# Altium PCB Led Panel.PcbDoc
Units mm, origin at the board's own origin, x right, y up, seen from the top; angles counter-clockwise.
Board outline 58 x 58 mm, 2 copper layers (Top Layer, Bottom Layer), stack 1.57 mm thick; 50 components, 2 nets, 107 pads, 99 vias.
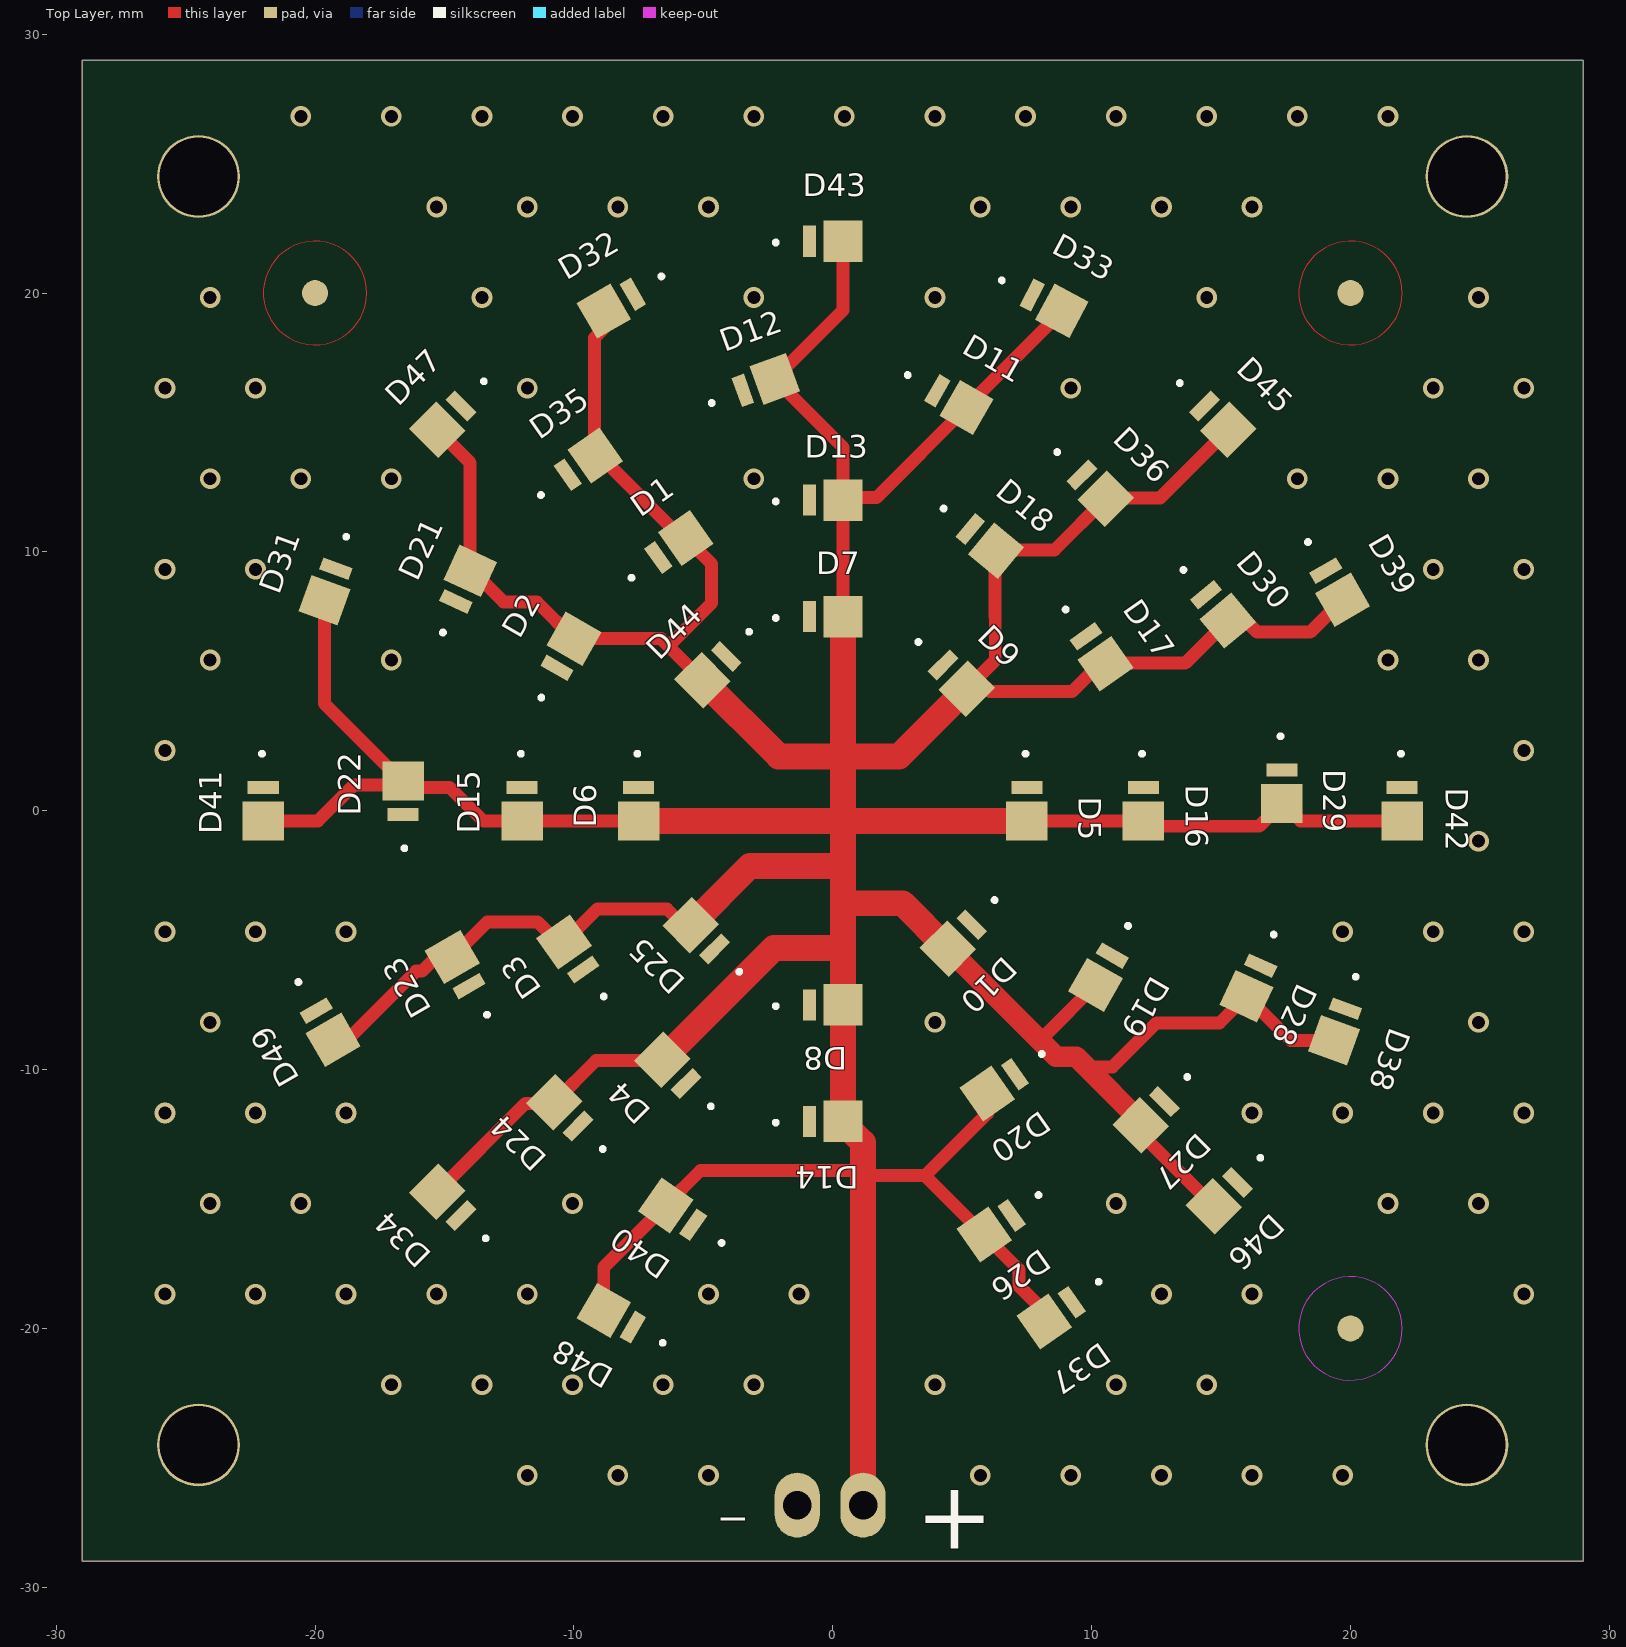
[diagram p0: Top Layer view]
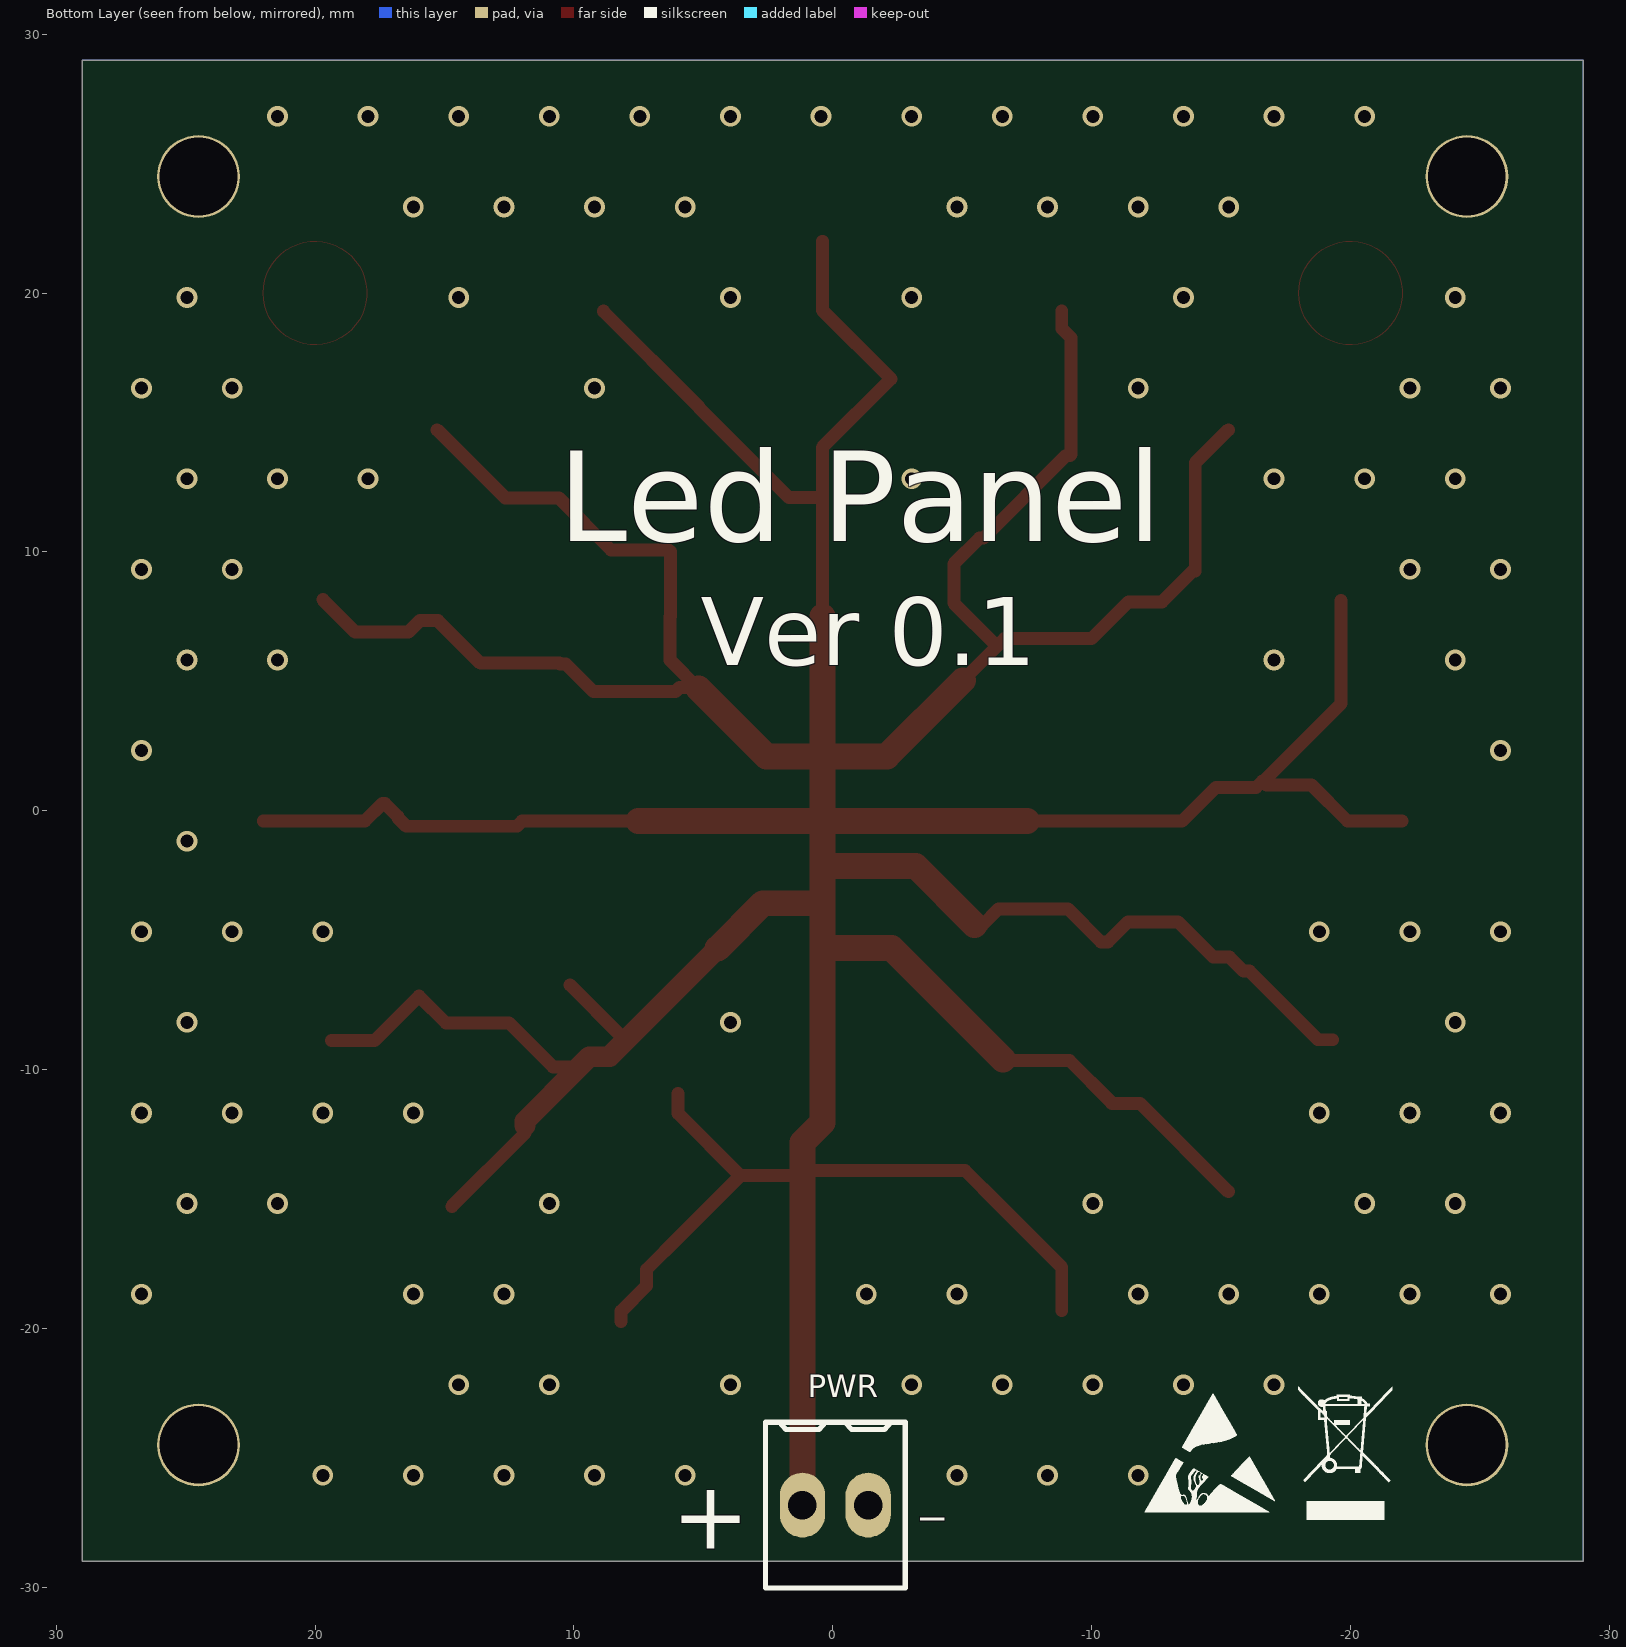
[diagram p1: Bottom Layer view, seen from below]
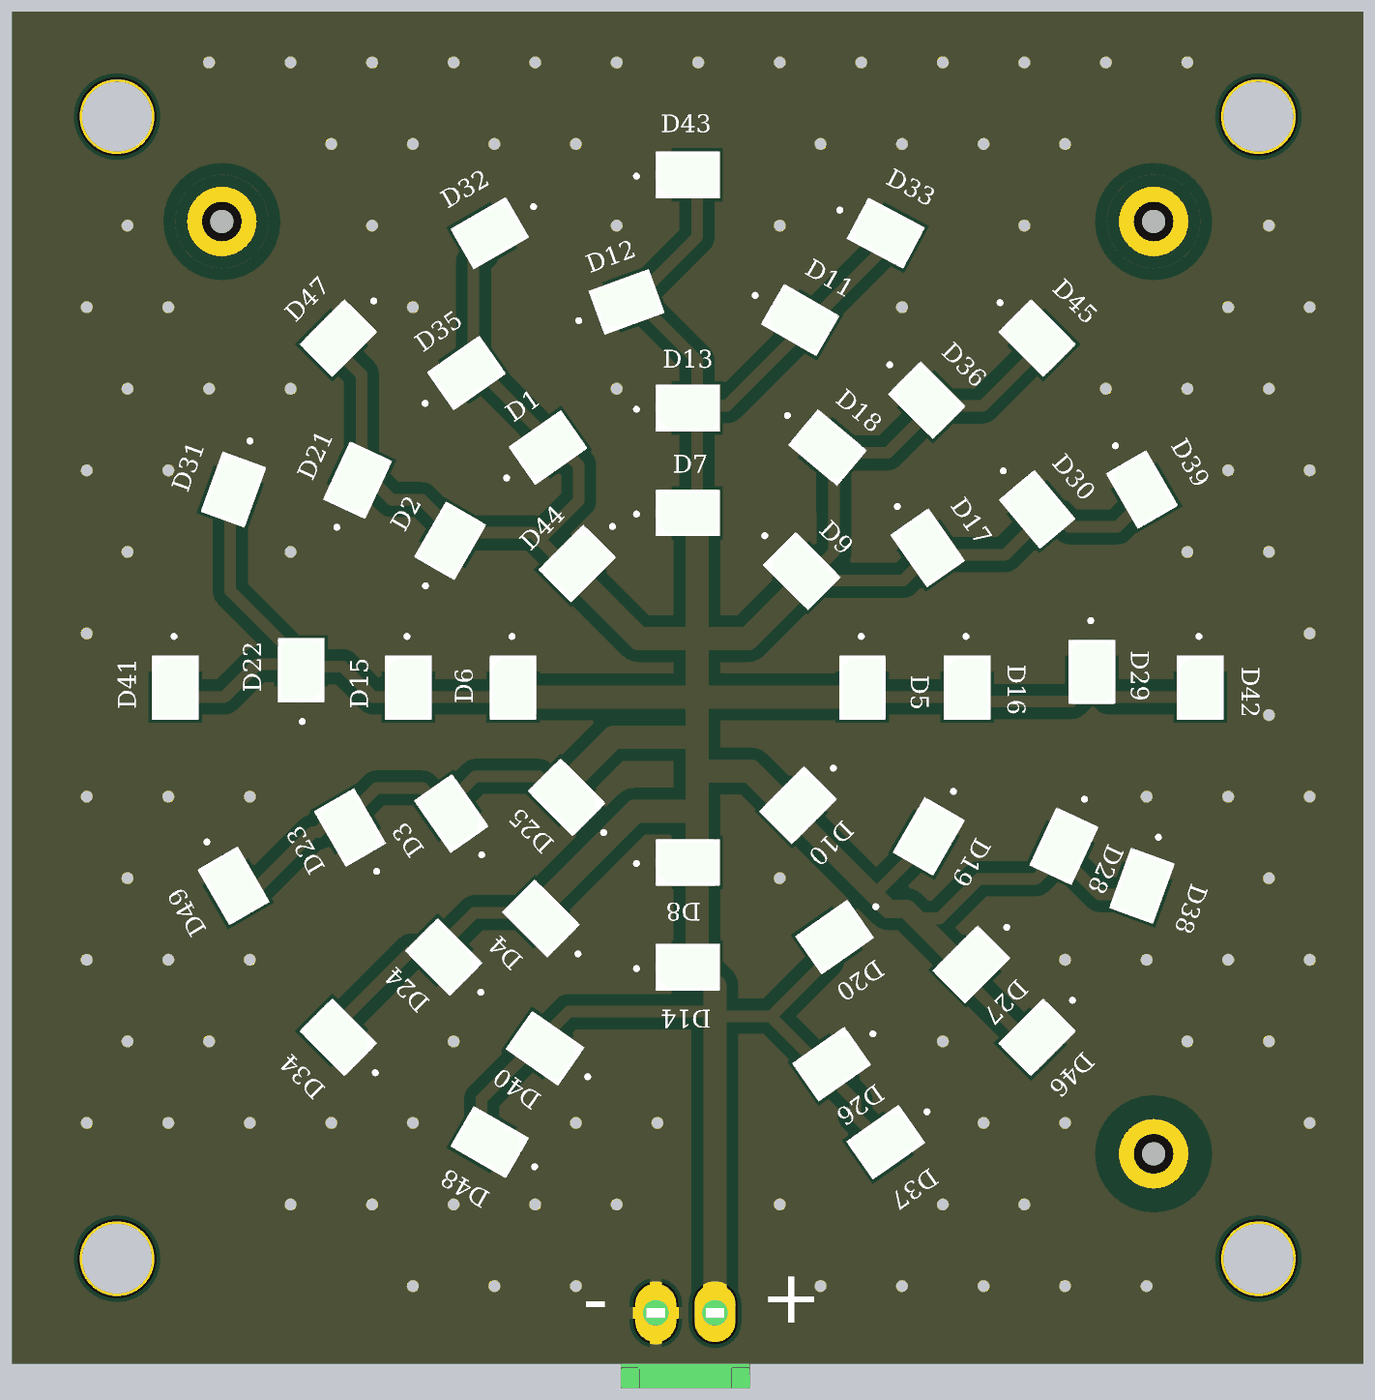
[diagram p2: 3D render of the assembled board from above, using the file's embedded part models]

## Layer stack, top to bottom
Top Solder: solder mask 0.0102, Solder Resist, Dk 3.5
Top Layer: signal copper 0.0356
Dielectric 1: core 1.4986, Core-043, Dk 4.3
Bottom Layer: signal copper 0.0356
Bottom Solder: solder mask 0.0102, Solder Resist, Dk 3.5

## Board outline
-29,-29 -29,29 29,29 29,-29

## Design rules (kind name [scope] priority, off if disabled: settings)
Clearance [All] p1: gap=0.254 ignorepadtopadclearanceinfootprint=FALSE except(0: Arc-Hole Track-Hole SMDPad-Hole THPad-Hole Via-Hole Fill-Hole Poly-Hole Region-Hole Text-Hole; 0.35: SMDPad-Fill SMDPad-Poly SMDPad-Region; 0.5: Arc-Fill Arc-Poly Arc-Region Track-Fill Track-Poly Track-Region)
PlaneClearance [All] p1: clearance=0.5
PlaneConnect [All] p1: planeconnectstyle=Relief reliefexpansion=0.508 reliefentries=4 reliefconductorwidth=0.5 reliefairgap=0.254
PolygonConnect [All] p1: thpad.connectstyle=Relief thpad.reliefconductorwidth=0.5 thpad.reliefentries=4 thpad.polygonreliefangle="90 Angle" thpad.airgapwidth=0.254 smdpad.connectstyle=Relief smdpad.reliefconductorwidth=0.35 smdpad.reliefentries=4 smdpad.polygonreliefangle="90 Angle" smdpad.airgapwidth=0.254 via.connectstyle=Direct via.reliefconductorwidth=0.254 via.reliefentries=4 via.polygonreliefangle="90 Angle" via.airgapwidth=0.254
RoutingVias [All] p1: holewidth=0.711 width=1.27 viastyle="Through Hole" minholewidth=0.711 minwidth=1.27 maxholewidth=0.711 maxwidth=1.27
SolderMaskExpansion [All] p1: expansion=0.102 istentingtop=FALSE
Width [All] p1: maxlimit=1 minlimit=0.35 preferedwidth=0.5
28 further rules are at their usual default settings.

## Components (designator, comment, footprint, x,y, rotation, side; value= is the part's Value field where it differs from the comment)
D1 "L1IG-0750100000000" L1IG0750100000000 -6,10.3 r35 top
D2 "L1IG-0750100000000" L1IG0750100000000 -10.2,6.3 r60 top
D3 "L1IG-0750100000000" L1IG0750100000000 -10.15,-5.4 r125 top
D4 "L1IG-0750100000000" L1IG0750100000000 -6.3,-9.9 r135 top
D5 "L1IG-0750100000000" L1IG0750100000000 7.5,0 r270 top
D6 "L1IG-0750100000000" L1IG0750100000000 -7.5,0 r270 top
D7 "L1IG-0750100000000" L1IG0750100000000 0,7.5 r0 top
D8 "L1IG-0750100000000" L1IG0750100000000 0,-7.5 r0 top
D9 "L1IG-0750100000000" L1IG0750100000000 4.9,5 r315 top
D10 "L1IG-0750100000000" L1IG0750100000000 4.733,-5.042 r225 top
D11 "L1IG-0750100000000" L1IG0750100000000 4.825,15.775 r330 top
D12 "L1IG-0750100000000" L1IG0750100000000 -2.625,16.55 r20 top
D13 "L1IG-0750100000000" L1IG0750100000000 0,12 r0 top
D14 "L1IG-0750100000000" L1IG0750100000000 0,-12 r0 top
D15 "L1IG-0750100000000" L1IG0750100000000 -12,0 r270 top
D16 "L1IG-0750100000000" L1IG0750100000000 12,0 r270 top
D17 "L1IG-0750100000000" L1IG0750100000000 10.3,6 r305 top
D18 "L1IG-0750100000000" L1IG0750100000000 6,10.3 r320 top
D19 "L1IG-0750100000000" L1IG0750100000000 10.35,-6.379 r240 top
D20 "L1IG-0750100000000" L1IG0750100000000 6.3,-10.7 r215 top
D21 "L1IG-0750100000000" L1IG0750100000000 -14.175,8.9 r65 top
D22 "L1IG-0750100000000" L1IG0750100000000 -16.6,0.75 r90 top
D23 "L1IG-0750100000000" L1IG0750100000000 -14.5,-6 r120 top
D24 "L1IG-0750100000000" L1IG0750100000000 -10.475,-11.55 r135 top
D25 "L1IG-0750100000000" L1IG0750100000000 -5.2,-4.7 r135 top
D26 "L1IG-0750100000000" L1IG0750100000000 6.175,-16.15 r215 top
D27 "L1IG-0750100000000" L1IG0750100000000 12.175,-11.875 r225 top
D28 "L1IG-0750100000000" L1IG0750100000000 16.15,-6.8 r245 top
D29 "L1IG-0750100000000" L1IG0750100000000 17.35,0.675 r270 top
D30 "L1IG-0750100000000" L1IG0750100000000 15,7.65 r310 top
D31 "L1IG-0750100000000" L1IG0750100000000 -19.5,8.5 r250 top
D32 "L1IG-0750100000000" L1IG0750100000000 -8.5,19.5 r210 top
D33 "L1IG-0750100000000" L1IG0750100000000 8.5,19.5 r332 top
D34 "L1IG-0750100000000" L1IG0750100000000 -15,-15 r135 top
D35 "L1IG-0750100000000" L1IG0750100000000 -9.5,13.5 r35 top
D36 "L1IG-0750100000000" L1IG0750100000000 10.262,12.334 r315 top
D37 "L1IG-0750100000000" L1IG0750100000000 8.5,-19.5 r215 top
D38 "L1IG-0750100000000" L1IG0750100000000 19.5,-8.5 r250 top
D39 "L1IG-0750100000000" L1IG0750100000000 19.5,8.5 r300 top
D40 "L1IG-0750100000000" L1IG0750100000000 -6.125,-15.475 r145 top
D41 "L1IG-0750100000000" L1IG0750100000000 -22,0 r270 top
D42 "L1IG-0750100000000" L1IG0750100000000 22,0 r270 top
D43 "L1IG-0750100000000" L1IG0750100000000 0,22 r0 top
D44 "L1IG-0750100000000" L1IG0750100000000 -4.75,5.325 r225 top
D45 "L1IG-0750100000000" L1IG0750100000000 15,15 r315 top
D46 "L1IG-0750100000000" L1IG0750100000000 15,-15 r225 top
D47 "L1IG-0750100000000" L1IG0750100000000 -15,15 r225 top
D48 "L1IG-0750100000000" L1IG0750100000000 -8.5,-19.5 r150 top
D49 "L1IG-0750100000000" L1IG0750100000000 -19.5,-8.5 r300 top
PWR "282834-2" "TE 282834-2" -0.1,-26.825 r180 bottom (schematic designator J1)

## Footprints (in the part's own frame and the unit in brackets; to place one, negate y for a bottom-side part, rotate by r counter-clockwise, add the part's x,y. Pads: shape width x height; smd on the part's side, far side on the other; paste and mask are expansions set on the pad)
L1IG0750100000000 [mm]
  rect 0.5x1.2 smd: 1(-0.9,0)
  rect 1.5x1.6 smd: 2(0.4,0)
  silkscreen extent -2.25,-0.1 -2.15,0, body extent -1.38,-1 1.37,1, height 0.6
"TE 282834-2" [mm]
  oval 1.75x2.5 hole 1.1: 1(-1.27,0) 2(1.27,0)
  silkscreen extent -2.7,-3.2 2.7,3.2, body extent -2.77,-3.25 2.77,3.25, height 10

## Part data
D1 D2 D3 D4 D5 D6 D7 D8 D9 D10 D11 D12 D13 D14 D15 D16 D17 D18 D19 D20 D21 D22 D23 D24 D25 D26 D27 D28 D29 D30 D31 D32 D33 D34 D35 D36 D37 D38 D39 D40 D41 D42 D43 D44 D45 D46 D47 D48 D49: "Infrared Emitters - High Power Broadrange IR LED 600 - 1050nm", Manufacturer_Name=Lumileds, Mouser Part Number=997-L1IG075010000, Datasheet Link=https://www.lumileds.com/uploads/838/DS263-luxeon-ir-onyx-datasheet-pdf, Manufacturer_Part_Number=L1IG-0750100000000, Mouser Price/Stock=https://www.mouser.co.uk/ProductDetail/Lumileds/L1IG-0750100000000?qs=UXgszm6BlbFsaqyaTO4YIQ%3D%3D
PWR: "TERM BLK 2P SIDE ENT 2.54MM PCB", Color=Green, Current=10A, Manufacturer="TE Connectivity AMP Connectors", Supplier Part Number 1=A98333-ND, Voltage=150V, ComponentLink1Description=Datasheet, ComponentLink1URL=https://www.te.com/commerce/DocumentDelivery/DDEController?Action=srchrtrv&DocNm=282834&DocType=Customer+Drawing&DocLang=English, ComponentLink2Description="DigiKey Link", ComponentLink2URL=http://digikey.com/product-detail/en/te-connectivity-amp-connectors/282834-2/A98333-ND/1150135, LastUpdated="1/15/2020 4:15:38 AM", Lifecycle Status=Active, Mating Orientation="Horizontal with Board", Minimum Order=1, Mounting Type="Through Hole", Number of Levels=1, Packaging=Bulk, Part Number=282834-2, Part Status=Active, Pitch="0.100\" (2.54mm)", Positions Per Level=2, Price=0.88, Series=Buchanan, Supplier 1=DigiKey, Wire Gauge="16-30 AWG", Wire Termination="Screw - Rising Cage Clamp"

## Free pads (board coordinates)
  round 1 smd paste+0 mask+1: F1(20,-20) F2(20,20) F3(-20,20)
  round 3.2 hole 3 mask+0.102: MH(-24.5,-24.5) MH(-24.5,24.5) MH(24.5,-24.5) MH(24.5,24.5)

## Via types
v1: diameter 0.8, hole 0.5, Top Layer to Bottom Layer, tented both sides, 99 vias

## Nets (pads, with @x,y where several pads share a name; then routed paths per layer and width w, separated by ;. In a path a pad name is that pad's centre, name@x,y a point inside that pad or via, vN(x,y) a via of type N, cw(c..) or ccw(c..) an arc to the next point about the centre after c; other vN are vias at no path point)
3V3: D1.2 D2.2 D3.2 D4.2 D5.2 D6.2 D7.2 D8.2 D9.2 D10.2 D11.2 D12.2 D13.2 D14.2 D15.2 D16.2 D17.2 D18.2 D19.2 D20.2 D21.2 D22.2 D23.2 D24.2 D25.2 D26.2 D27.2 D28.2 D29.2 D30.2 D31.2 D32.2 D33.2 D34.2 D35.2 D36.2 D37.2 D38.2 D39.2 D40.2 D41.2 D42.2 D43.2 D44.2 D45.2 D46.2 D47.2 D48.2 D49.2 PWR.1 | length 300
  Top Layer w0.5: D41.2 -19.889,-0.4 -18.49,1 -16.75,1 D22.2 ; D31.2 -19.637,4.137 -16.65,1.15 D22.2 ; D49.2 -18.746,-8.846 -16.1,-6.2 -15.868,-6.2 -15.322,-5.654 D23.2 -13.346,-4.3 -11.4,-4.3 -10.628,-5.072 D3.2 -10.367,-5.072 -9.095,-3.8 -6.4,-3.8 -5.783,-4.417 D25.2 ; D34.2 -11.868,-11.303 -10.793,-11.303 D24.2 -9.143,-9.653 -6.618,-9.653 D4.2 ; D47.2 -14.006,13.44 D21.2 -13.909,9.263 -12.714,8.068 -11.421,8.068 D2.2 -6.637,6.646 -6.345,6.355 ; D48.2 -8.846,-17.639 D40.2 -5.107,-13.9 1.115,-13.9 1.17,-13.845 ; D32.2 -8.846,18.628 -9.201,18.274 -9.201,13.758 D35.2 -9.022,13.729 -5.822,10.529 D1.2 -4.68,9.537 -4.68,8.02 -6.345,6.355 ; D6.2 D15.2 -13.5,-0.4 -14.8,0.9 -16.35,0.9 D22.2 ; D44.2 -6.345,6.355 ; D7.2 D13.2 ; D43.2 0.4,19.336 D12.2 0.4,14.038 D13.2 ; 1.17,-14.1 3.568,-14.1 ; D20.2 5.972,-11.696 3.568,-14.1 ; D5.2 D16.2 12.2,-0.6 16.475,-0.6 16.8,-0.275 16.8,-0.225 17.3,0.275 17.4,0.275 18.075,-0.4 D42.2 ; 7.813,-8.687 8.188,-8.687 D19.2 ; D37.2 8.172,-19.332 7.191,-18.351 7.191,-17.723 D26.2 3.568,-14.1 ; D33.2 8.853,19.283 5.171,15.602 D11.2 1.696,12.1 0.5,12.1 D13.2 ; 9.8,-9.9 10.8,-9.9 12.5,-8.2 14.943,-8.2 D28.2 17.694,-8.876 D38.2 ; D27.2 11.892,-12.458 D46.2 ; D45.2 12.652,12.086 10.58,12.086 D36.2 8.569,10.075 6.339,10.075 D18.2 6.274,10.011 6.274,7.513 6.279,7.509 6.279,5.813 D9.2 5.218,4.753 5.925,4.753 6.078,4.6 9.243,4.6 10.315,5.672 D17.2 10.558,5.701 13.615,5.701 D30.2 15.951,7.344 16.395,6.9 18.446,6.9 D39.2
  Top Layer w0.8: D10.2 7.813,-8.687 8.625,-9.5 9.4,-9.5 9.8,-9.9 11.892,-11.992 D27.2
  Top Layer w1: D6.2 0.4,-0.4 ; D4.2 -2.266,-5.3 0.4,-5.3 ; D25.2 -3.2,-2.134 0.366,-2.134 0.4,-2.1 ; D44.2 -2.091,2.1 0.4,2.1 ; D7.2 0.4,2.1 ; PWR.1 1.17,-13.845 1.17,-12.82 0.4,-12.05 D8.2 0.4,-5.3 ; D10.2 2.7,-3.575 0.675,-3.575 0.4,-3.3 ; D9.2 2.566,2.1 0.4,2.1 ; D5.2 2.6,-0.4 0.4,-0.4 ; 0.4,-5.3 0.4,-3.3 ; 0.4,-3.3 0.4,-2.1 ; 0.4,-2.1 0.4,-0.4 ; 0.4,-0.4 0.4,2.1
GND: D1.1 D2.1 D3.1 D4.1 D5.1 D6.1 D7.1 D8.1 D9.1 D10.1 D11.1 D12.1 D13.1 D14.1 D15.1 D16.1 D17.1 D18.1 D19.1 D20.1 D21.1 D22.1 D23.1 D24.1 D25.1 D26.1 D27.1 D28.1 D29.1 D30.1 D31.1 D32.1 D33.1 D34.1 D35.1 D36.1 D37.1 D38.1 D39.1 D40.1 D41.1 D42.1 D43.1 D44.1 D45.1 D46.1 D47.1 D48.1 D49.1 PWR.2
  other v1: -11.8,-25.675 -8.3,-25.675 -4.8,-25.675 5.7,-25.675 9.2,-25.675 12.7,-25.675 16.2,-25.675 19.7,-25.675 -17.05,-22.175 -13.55,-22.175 -10.05,-22.175 -6.55,-22.175 -3.05,-22.175 3.95,-22.175 10.95,-22.175 14.45,-22.175 -25.8,-18.675 -22.3,-18.675 -18.8,-18.675 -15.3,-18.675 -11.8,-18.675 -4.8,-18.675 -1.3,-18.675 12.7,-18.675 16.2,-18.675 26.7,-18.675 -24.05,-15.175 -20.55,-15.175 -10.05,-15.175 10.95,-15.175 21.45,-15.175 24.95,-15.175 -25.8,-11.675 -22.3,-11.675 -18.8,-11.675 16.2,-11.675 19.7,-11.675 23.2,-11.675 26.7,-11.675 -24.05,-8.175 3.95,-8.175 24.95,-8.175 -25.8,-4.675 -22.3,-4.675 -18.8,-4.675 19.7,-4.675 23.2,-4.675 26.7,-4.675 24.95,-1.175 -25.8,2.325 26.7,2.325 -24.05,5.825 -17.05,5.825 21.45,5.825 24.95,5.825 -25.8,9.325 -22.3,9.325 23.2,9.325 26.7,9.325 -24.05,12.825 -20.55,12.825 -17.05,12.825 -3.05,12.825 17.95,12.825 21.45,12.825 24.95,12.825 -25.8,16.325 -22.3,16.325 -11.8,16.325 9.2,16.325 23.2,16.325 26.7,16.325 -24.05,19.825 -13.55,19.825 -3.05,19.825 3.95,19.825 14.45,19.825 24.95,19.825 -15.3,23.325 -11.8,23.325 -8.3,23.325 -4.8,23.325 5.7,23.325 9.2,23.325 12.7,23.325 16.2,23.325 -20.55,26.825 -17.05,26.825 -13.55,26.825 -10.05,26.825 -6.55,26.825 -3.05,26.825 0.45,26.825 3.95,26.825 7.45,26.825 10.95,26.825 14.45,26.825 17.95,26.825 21.45,26.825
copper on no net: | length 25.1
  Top Layer w0.01: -18,20 ccw(c-20,20) -18,20 ; 22,20 ccw(c20,20) 22,20

## Polygon pours and split planes (outlines as drawn)
GND on Top Layer "NONET_L01_P000" (solid, shelved, pour order 0): -29,-29 -29,29 29,29 29,-29
GND on Bottom Layer "NONET_L02_P002" (solid, shelved, pour order 2): -29,-29 -29,29 29,29 29,-29
GND on Bottom Layer "NONET_L02_P001" (solid, shelved, pour order 1): -29,-29 -29,29 29,29 29,-29

## Keep-outs
Top Layer:
  circle w0.01: c20,-20 r2

## Silkscreen, mask and mechanical layers (free items; w line width, h text height)
Top Overlay:
  text "+" at 3.2,-25.386 h4.5 r180
  text "-" at -4.5,-25.617 h4.5 r180
Bottom Overlay:
  drawing of 5 lines, arcs and shapes, not listed
  text "Led Panel" at 10.6,9.259 h6
  text "Ver 0.1" at 5.1,4.744 h4.5
  text "+" at 3.2,-25.386 h4.5 r180
  text "-" at -4.5,-25.617 h4.5 r180
Mechanical 1:
  circle w0.1: c0.052,-0.017 r25
  lines w0.127: -29,-29 29,-29 29,29 -29,29 -29,-29